# Altium PCB Sync_Rectifier_v0.1.PcbDoc
Units mil, origin at the board's own origin, x right, y up, seen from the top; angles counter-clockwise.
Board outline 980 x 1165 mil, 2 copper layers (Top Layer, Bottom Layer); 8 components, 8 nets, 56 pads, 10 vias.
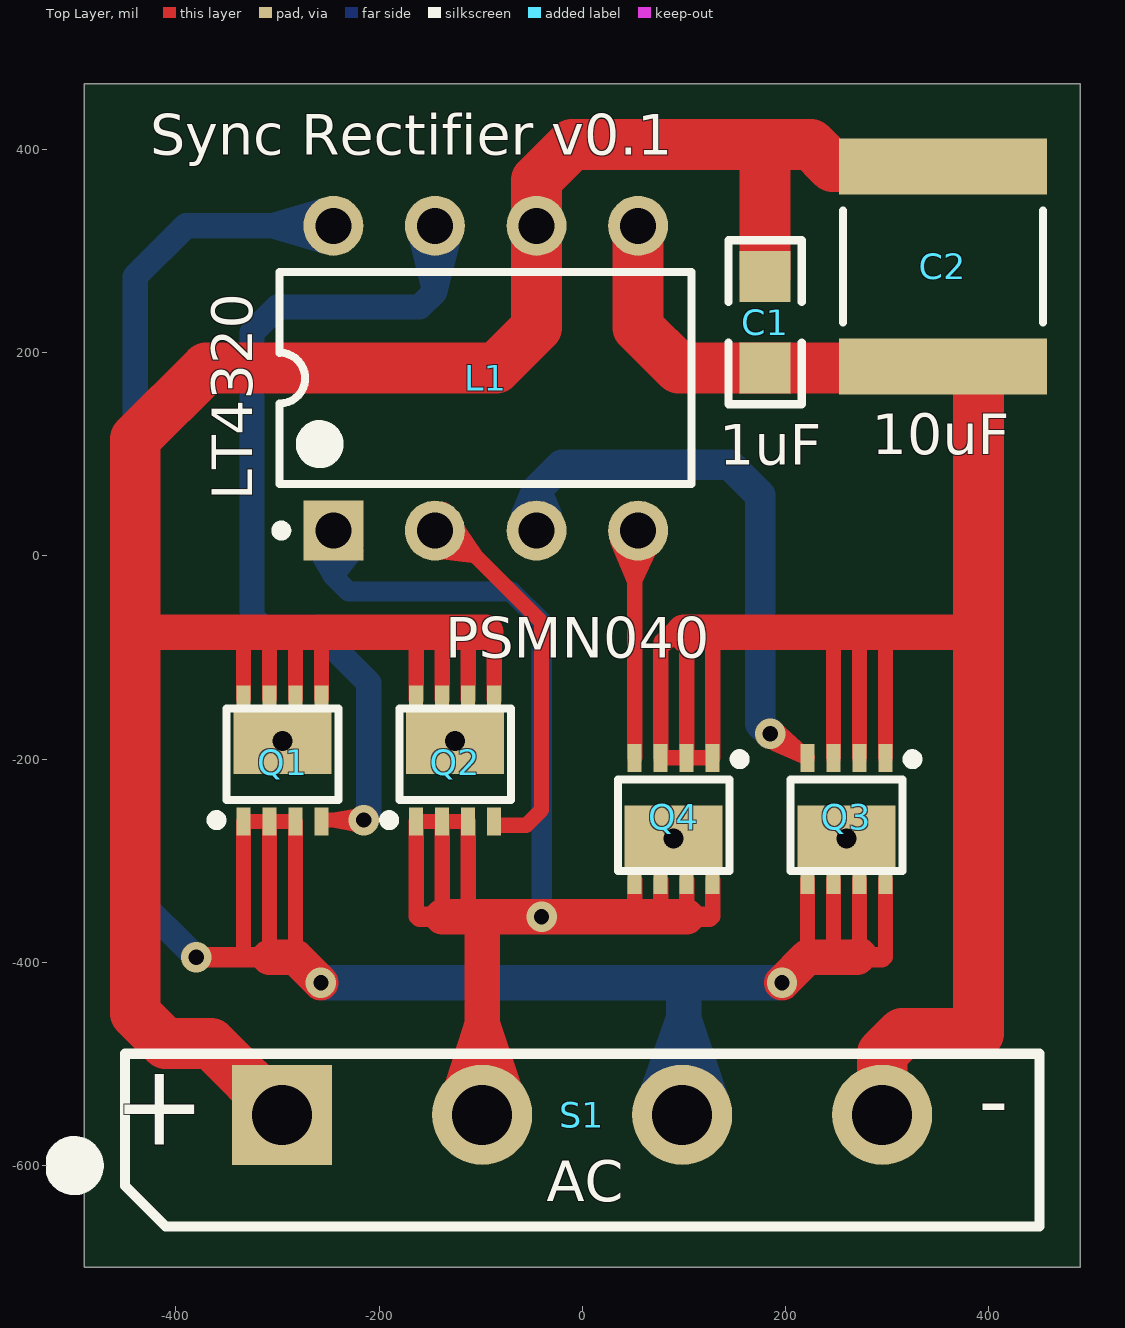
[diagram p0: Top Layer view]
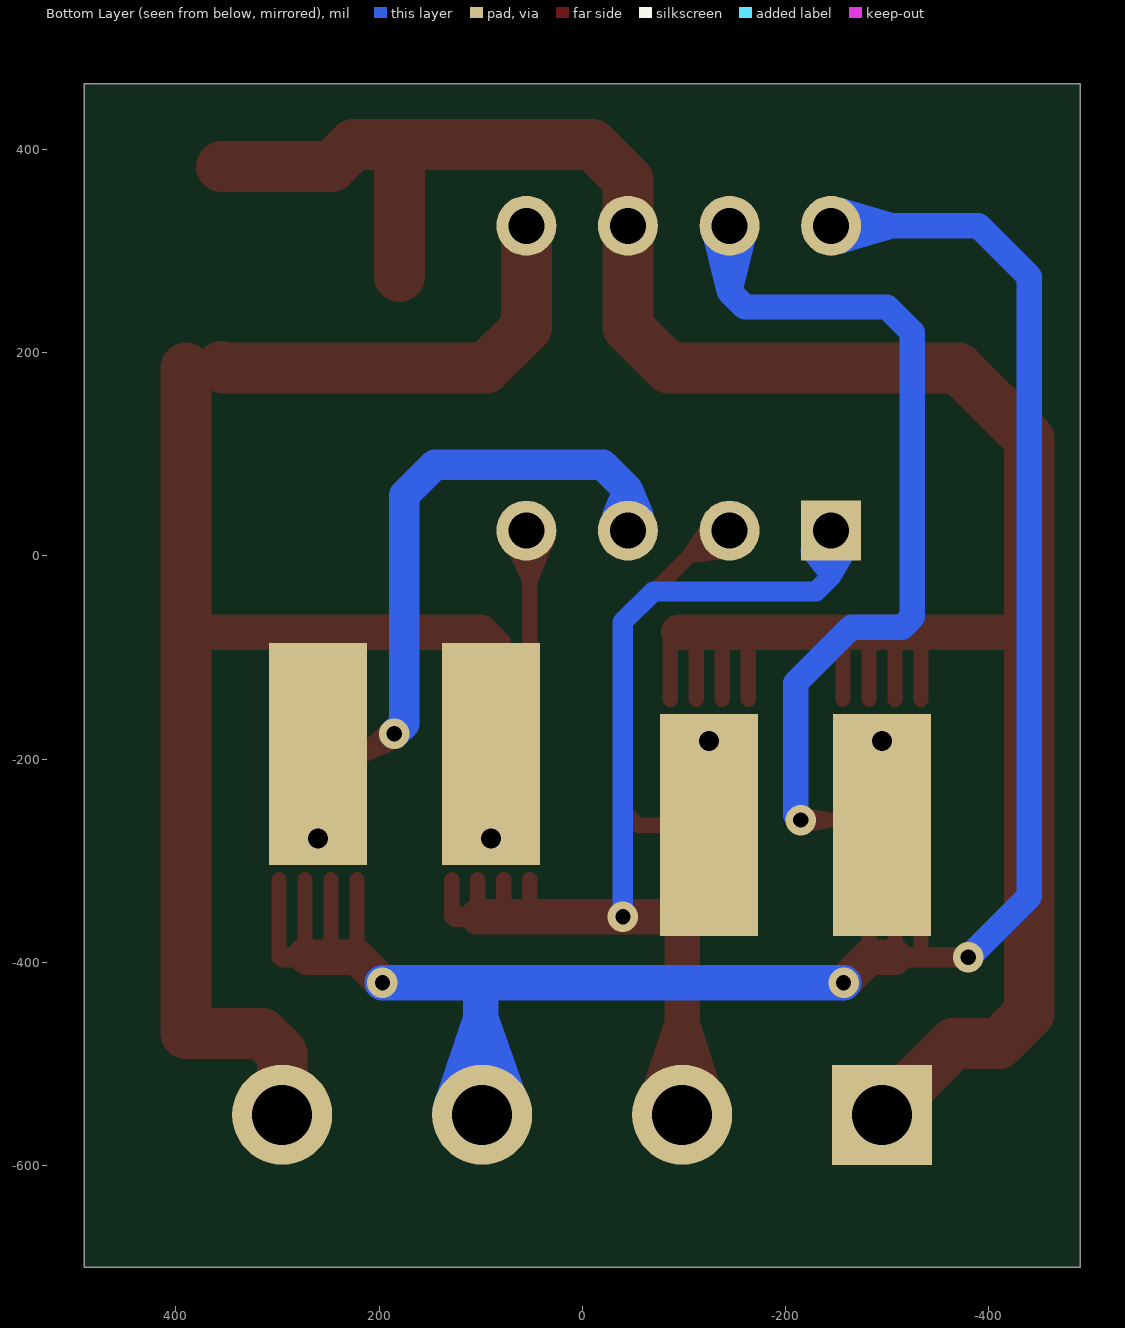
[diagram p1: Bottom Layer view, seen from below]

## Layer stack, top to bottom
Top Solder: solder mask 0.4, Solder Resist, Dk 3.5
Top Layer: signal copper 1.4
Dielectric 1: dielectric 12.6, FR-4, Dk 4.8
Bottom Layer: signal copper 1.4
Bottom Solder: solder mask 0.4, Solder Resist, Dk 3.5

## Board outline
-490,460 -490,465 490,465 490,-700 -490,-700

## Design rules (kind name [scope] priority, off if disabled: settings)
Clearance [All] p1: gap=10 ignorepadtopadclearanceinfootprint=FALSE except(0: Arc-Hole Track-Hole SMDPad-Hole THPad-Hole Via-Hole Fill-Hole Poly-Hole Region-Hole Text-Hole)
PolygonConnect [All] p1: connectstyle=Relief reliefconductorwidth=10 reliefentries=4 polygonreliefangle="90 Angle" airgapwidth=10
RoutingVias [All] p1: holewidth=28 width=50 viastyle="Through Hole" minholewidth=28 minwidth=50 maxholewidth=28 maxwidth=50
SolderMaskExpansion [All] p1: expansion=4
Width [All] p1: maxlimit=120 minlimit=10 preferedwidth=25
30 further rules are at their usual default settings.

## Components (designator, comment, footprint, x,y, rotation, side; value= is the part's Value field where it differs from the comment)
C1 "1uF" "C 0805" 180,230 r270 top
C2 "10uF" 2220 355,285 r270 top
L1 "LT4320" DIP-8 -95,175 r90 top
Q1 "PSMN040" SOT-1210-BL -295,-200 r90 top
Q2 "PSMN040" SOT-1210-BL -125,-200 r90 top
Q3 "PSMN040" SOT-1210-BL 260,-260 r270 top
Q4 "PSMN040" SOT-1210-BL 90,-260 r270 top
S1 "SyncRectifier" GBU 0,-550 r180 top

## Footprints (in the part's own frame and the unit in brackets; to place one, negate y for a bottom-side part, rotate by r counter-clockwise, add the part's x,y. Pads: shape width x height; smd on the part's side, far side on the other; paste and mask are expansions set on the pad)
2220 [mm] "Chip Capacitor, Body 5.7x5.0mm, IPC High Density"
  rect 1.4x5.2 smd: 1(-2.5,0) 2(2.5,0)
  silkscreen extent -1.4,-2.5 1.4,2.5, body extent -2.95,-2.63 2.95,2.63, height 1.4
"C 0805" [mil] "无极性贴片电容"
  rect 50x50 smd: 1(-45,0) 2(45,0)
  silkscreen extent -81,-36 81,36, body extent -39,-24 39,24, height 20
DIP-8 [mm] "DIP; 8 Leads; Row Spacing 7.62 mm; Pitch 2.54 mm"
  rect 1.5x1.5 hole 0.9: 1(-3.81,3.81)
  round 1.5 hole 0.9: 2(-3.81,1.27) 3(-3.81,-1.27) 4(-3.81,-3.81) 5(3.81,-3.81) 6(3.81,-1.27) 7(3.81,1.27) 8(3.81,3.81)
  silkscreen extent -3.93,-5.15 2.65,5.23, body extent -3.6,-5.15 3.6,5.15, height 5.08
GBU [mm] "整流桥，脚距：5mm/200mil"
  round 2.5 hole 1.5: AC1(-2.5,0) AC2(2.5,0) DC-(-7.5,0)
  rect 2.5x2.5 hole 1.5: DC+(7.5,0)
  silkscreen extent -11.43,-1.52 13.06,2.79, body extent -11,-1.15 11,2.35, height 20.8
SOT-1210-BL [mm] "SOT223, 4-Leads, Body 6.5x3.5mm, Pitch 2.3mm, Lead Span 7mm, IPC High Density"
  rect 0.7x0.35 smd: 1(-1.558,-0.325) 1(-1.558,0.325) 1(-1.558,0.975) 2(-1.558,-0.975) 3(1.492,-0.975) 3(1.492,-0.325) 3(1.492,0.325) 3(1.492,0.975)
  rect 5.55x2.45 smd far side: 3(-1.651,0)
  rect 1.65x2.45 smd: 3(0.46,0)
  silkscreen extent -1.65,-1.4 1.27,1.78, body extent -1.02,-1.4 1.34,1.4, height 1.7

## Part data
C1 C2: library part C-CD, "贴片钽电容", BOM名称=贴片钽电容, 学习资源=www.ooocke.com, 版权归属=源创客
L1: "Ideal Diode Bridge Controller"
Q1 Q2 Q3 Q4: library part PSMN040-100MSE, "N-channel 100 V 36.6 mΩ standard level MOSFET"

## Via types
v1: diameter 30, hole 15, Top Layer to Bottom Layer, 6 vias
v2: diameter 39.37, hole 19.68, Top Layer to Bottom Layer, 4 vias

## Nets (pads, with @x,y where several pads share a name; then routed paths per layer and width w, separated by ;. In a path a pad name is that pad's centre, name@x,y a point inside that pad or via, vN(x,y) a via of type N, cw(c..) or ccw(c..) an arc to the next point about the centre after c; other vN are vias at no path point)
NetC1_1: C1.1 C2.1 L1.6 Q1.3 Q2.3 S1.DC+ | length 2705.2
  Top Layer w15: Q1.3@-333.39,-141.26 -333.39,-80 ; Q1.3@-307.8,-141.26 -307.8,-80 ; Q1.3@-282.2,-141.26 -282.2,-80 ; Q1.3@-256.61,-141.26 -256.61,-80 ; Q2.3@-163.39,-141.26 -163.39,-80 ; Q2.3@-137.8,-141.26 -137.8,-80 ; Q2.3@-112.2,-141.26 -112.2,-80 ; Q2.3@-86.61,-141.26 -86.61,-80
  Top Layer w35: -420,-75 -95,-75
  Top Layer w50: S1.DC+ -365.28,-480 -410,-480 -440,-450 -440,115 -370,185 -85,185 -45,225 L1.6 -45,370 -10,405 180,405 ; C1.1 180,405 ; C2.1 246.57,383.43 225,405 180,405
  other v2: -295,-181.89 -125,-181.89
NetC1_2: C1.2 C2.2 L1.5 Q3.1 Q4.1 S1.DC- | length 2251.9
  Top Layer w15: 77.2,-90 77.2,-198.66 Q4.1@102.8,-198.66 ; 102.8,-90 Q4.1@102.8,-198.66 ; Q4.1@123.66,-198.66 Q4.1@102.8,-198.66 ; Q4.1@128.39,-198.66 128.39,-90 ; Q3.1@247.2,-198.66 247.2,-90 ; Q3.1@272.8,-198.66 272.8,-90 ; Q3.1@298.39,-198.66 298.39,-90
  Top Layer w20: 80,-85 90,-75 100,-75
  Top Layer w35: 102.8,-77.8 100,-75 390,-75
  Top Layer w50: L1.5 55,225 95,185 C1.2 353.43,185 C2.2 ; S1.DC- 295.28,-489.72 315,-470 390,-470 390,-75 C2.2@390,185
NetL1_1: L1.1 Q2.1 Q4.3 S1.AC2 | length 1758.5
  Top Layer w15: -163.39,-355 -163.39,-261.34 Q2.1@-137.8,-261.34 ; -137.8,-355 Q2.1@-137.8,-261.34 ; Q2.1@-115,-260 -116.34,-261.34 Q2.1@-137.8,-261.34 ; -112.2,-355 Q2.1@-112.2,-261.34 ; 51.61,-355 Q4.3@51.61,-318.74 ; 77.2,-355 Q4.3@77.2,-318.74 ; 102.8,-355 Q4.3@102.8,-318.74 ; 128.39,-355 Q4.3@128.39,-318.74
  Top Layer w20: -160,-355 -137.8,-355 ; 102.8,-355 125,-355
  Top Layer w35: -137.8,-355 -112.2,-355 v1(-40,-355) 51.61,-355 77.2,-355 102.8,-355 ; S1.AC2@-125,-545 -124.06,-541.99 -98.43,-460 ; -100,-365 -98.43,-366.57 -98.43,-460 ; S1.AC2 -98.43,-460 ; S1.AC2@-70,-545 -71.36,-540.95 -98.43,-460
  Bottom Layer w20: L1.1@-260,5 -245,-20 ; L1.1 -245,-20 ; L1.1@-225,5 -245,-20 ; v1(-40,-355) -40,-65 -70,-35 -230,-35 -245,-20
  Bottom Layer w35: S1.AC2@-125,-545 S1.AC2@-124.41,-542.85 ; S1.AC2@-73.13,-543.25 S1.AC2@-70,-555
  other v2: 90,-278.11
NetL1_2: L1.2 Q2.2 | length 472.9
  Top Layer w15: L1.2@-145,5 -105,0 ; L1.2 -130,25 -105,0 ; L1.2@-135,45 -128.85,35.77 -105,0 ; Q2.2@-85,-265 -55,-265 -40,-250 -40,-65 -105,0
NetL1_3: L1.3 Q3.2 | length 688.9
  Top Layer w15: v1(185,-175) Q3.2@215,-195 ; v1@190,-185 Q3.2 v1@190,-170
  Bottom Layer w30: L1.3@-55,40 -45,65 ; L1.3 -45,65 ; L1.3@-35,40 -45,65 ; v1(185,-175) 175,-165 175,60 145,90 -20,90 -45,65
NetL1_4: L1.4 Q4.2 | length 312.4
  Top Layer w15: L1.4@35,15 51.61,-25 ; Q4.2 51.61,-25 ; L1.4 51.61,21.61 51.61,-25 ; L1.4@70,15 51.61,-25
NetL1_7: L1.7 Q1.2 | length 1040.2
  Top Layer w15: Q1.2@-255,-260 -245,-260 ; v1@-220,-265 -245,-260 ; v1(-215,-260) -245,-260 ; v1@-215,-255 -215.81,-255.14 -245,-260
  Bottom Layer w25: v1(-215,-260) -210,-255 -210,-125 -265,-70 -315,-70 -325,-60 -325,220 -300,245 -160,245 -145,260 ; L1.7@-160,320 -145,260 ; L1.7 -145,260 ; L1.7@-130,320 -145,260
NetL1_8: L1.8 Q1.1 Q3.3 S1.AC1 | length 2793.7
  Top Layer w15: -333.39,-395 -333.39,-261.34 Q1.1@-307.8,-261.34 ; -307.8,-395 Q1.1@-307.8,-261.34 ; Q1.1@-285,-260 -286.34,-261.34 Q1.1@-307.8,-261.34 ; -282.2,-395 Q1.1@-282.2,-261.34 ; 221.61,-395 Q3.3@221.61,-318.74 ; 247.2,-392.8 Q3.3@247.2,-318.74 ; 272.8,-392.8 Q3.3@272.8,-318.74 ; 298.39,-395 Q3.3@298.39,-318.74
  Top Layer w20: v1(-380,-395) -333.39,-395 ; -330,-395 -307.8,-395 ; 270.59,-395 295,-395
  Top Layer w35: -307.8,-395 -282.2,-395 v1(-257.2,-420) ; S1.AC1@70,-540 S1.AC1@70.54,-538.68 ; S1.AC1@124.54,-540.3 S1.AC1@130,-555 ; v1(196.61,-420) 221.61,-395 270.59,-395 272.8,-392.8
  Bottom Layer w25: v1(-380,-395) -440,-335 -440,275 -390,325 -305,325 ; L1.8@-255,310 -305,325 ; L1.8@-255,340 -305,325 ; L1.8 -305,325
  Bottom Layer w35: v1(-257.2,-420) 100,-420 ; S1.AC1@70.01,-539.97 100,-455 ; S1.AC1 100,-548.43 100,-455 ; S1.AC1@130,-545 128.34,-540.03 100,-455 ; v1(196.61,-420) 100,-420 ; 100,-455 100,-420
  other v2: 260,-278.11

## Silkscreen, mask and mechanical layers (free items; w line width, h text height)
Top Overlay:
  text "Sync Rectifier v0.1" at -425,395 h40
Mechanical 1:
  lines w10: -490,-700 -490,465 490,465 490,-700 -490,-700
Drill Drawing:
  the board outline again, w10

## Text inside footprints (layer, text, board x,y; h text height)
S1: Top Overlay "-" at 420,-520 h60 r180; Top Overlay "+" at -370,-510 h80 r180; Top Overlay "AC" at -35,-635 h40; Top Overlay "AC" at -35,-635 h40